# Altium PCB CNC.PcbDoc (part 1 of 3)
Units mm, origin at the board's own origin, x right, y up, seen from the top; angles counter-clockwise.
Board outline 148.41 x 98.24 mm, 4 copper layers (Top Layer, Mid-Layer 1, Ground Plane in NEGATIVE, Bottom Layer), stack 0.867 mm thick; 230 components, 218 nets, 997 pads, 307 vias.
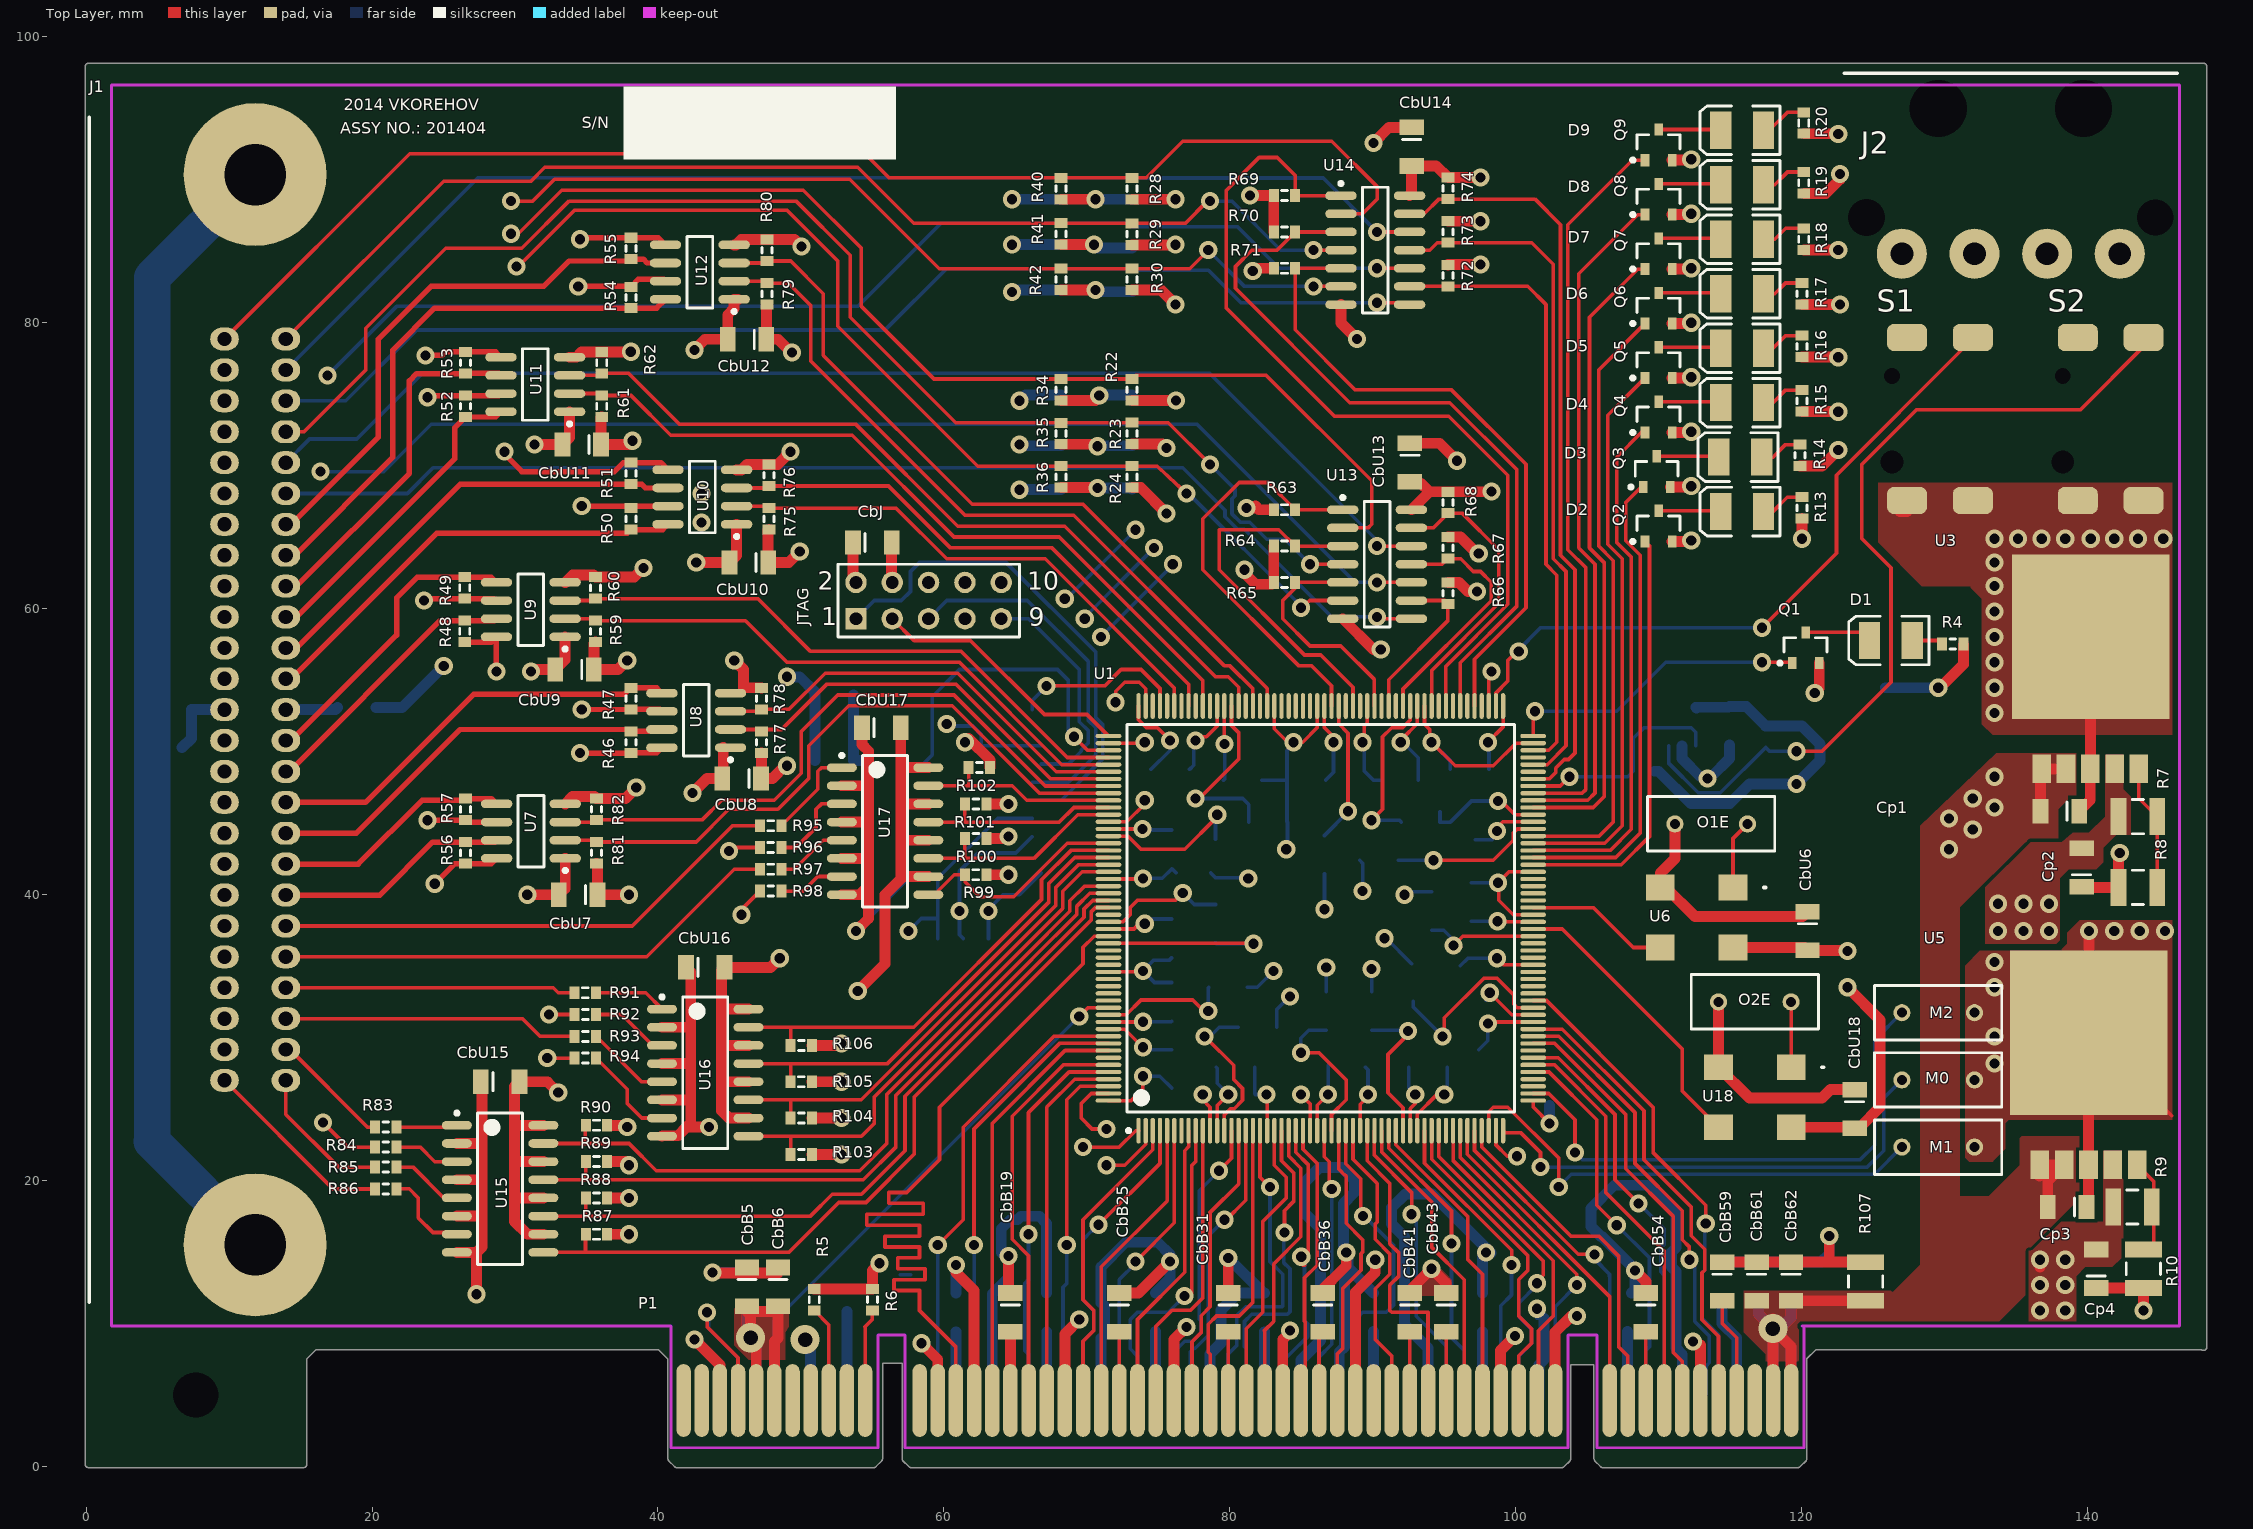
[diagram p0: Top Layer view]
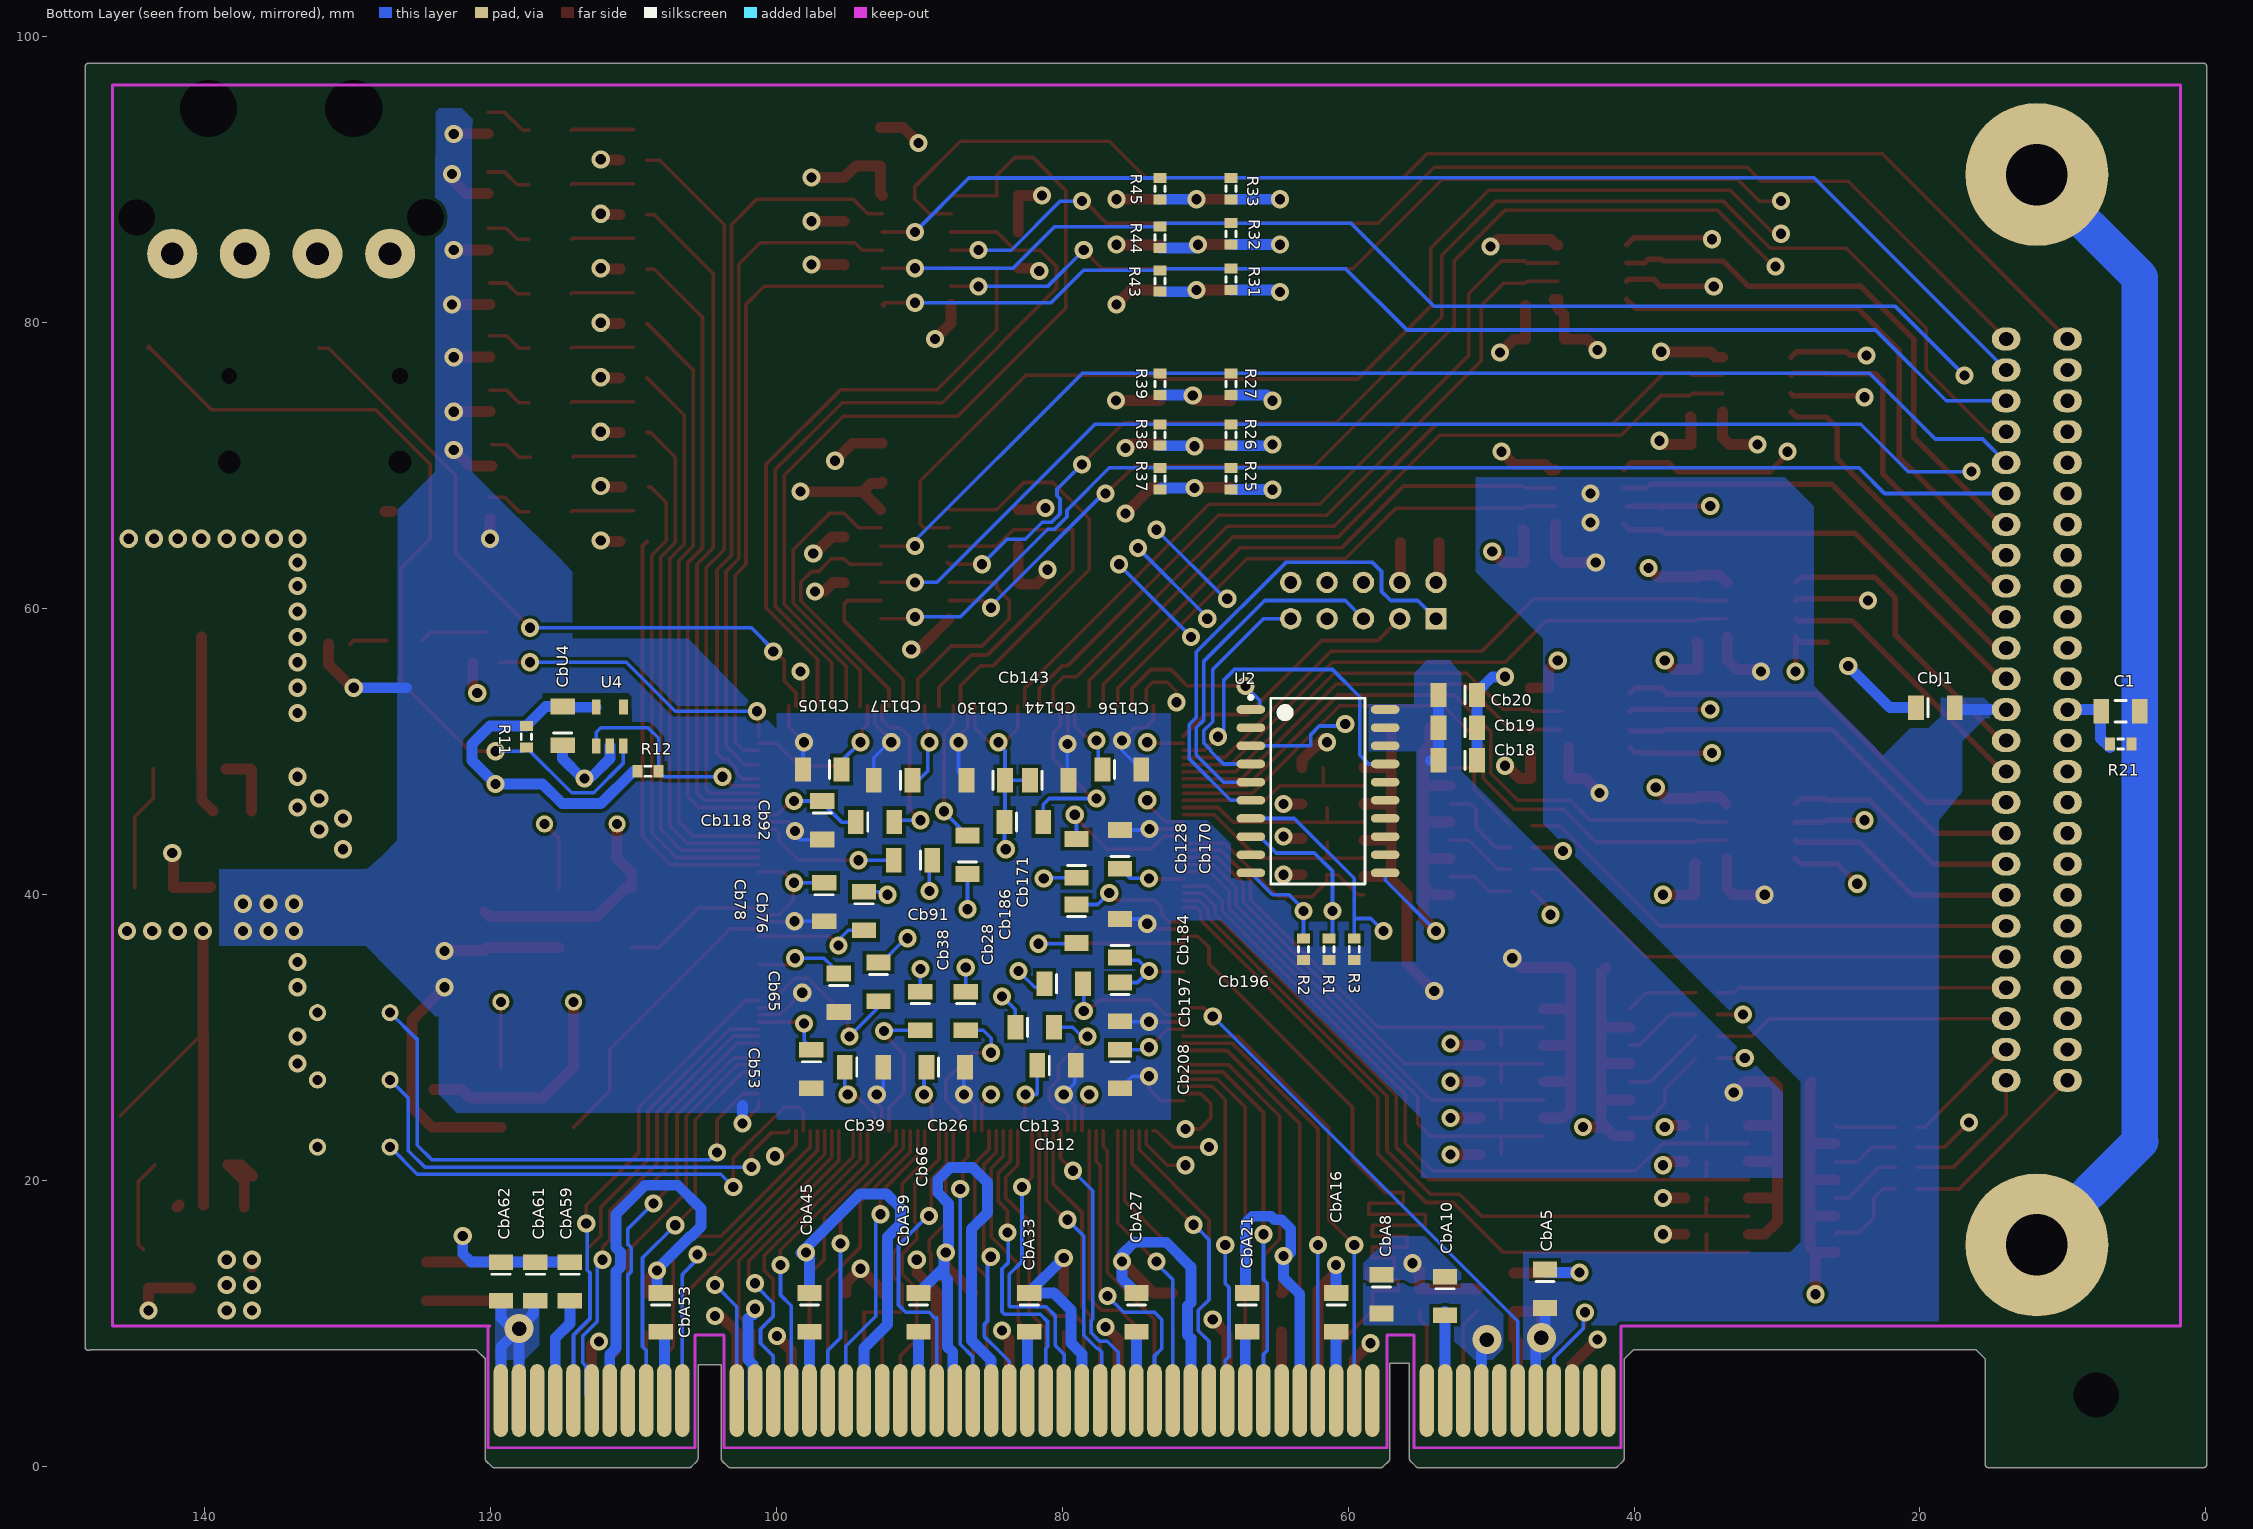
[diagram p1: Bottom Layer view, seen from below]
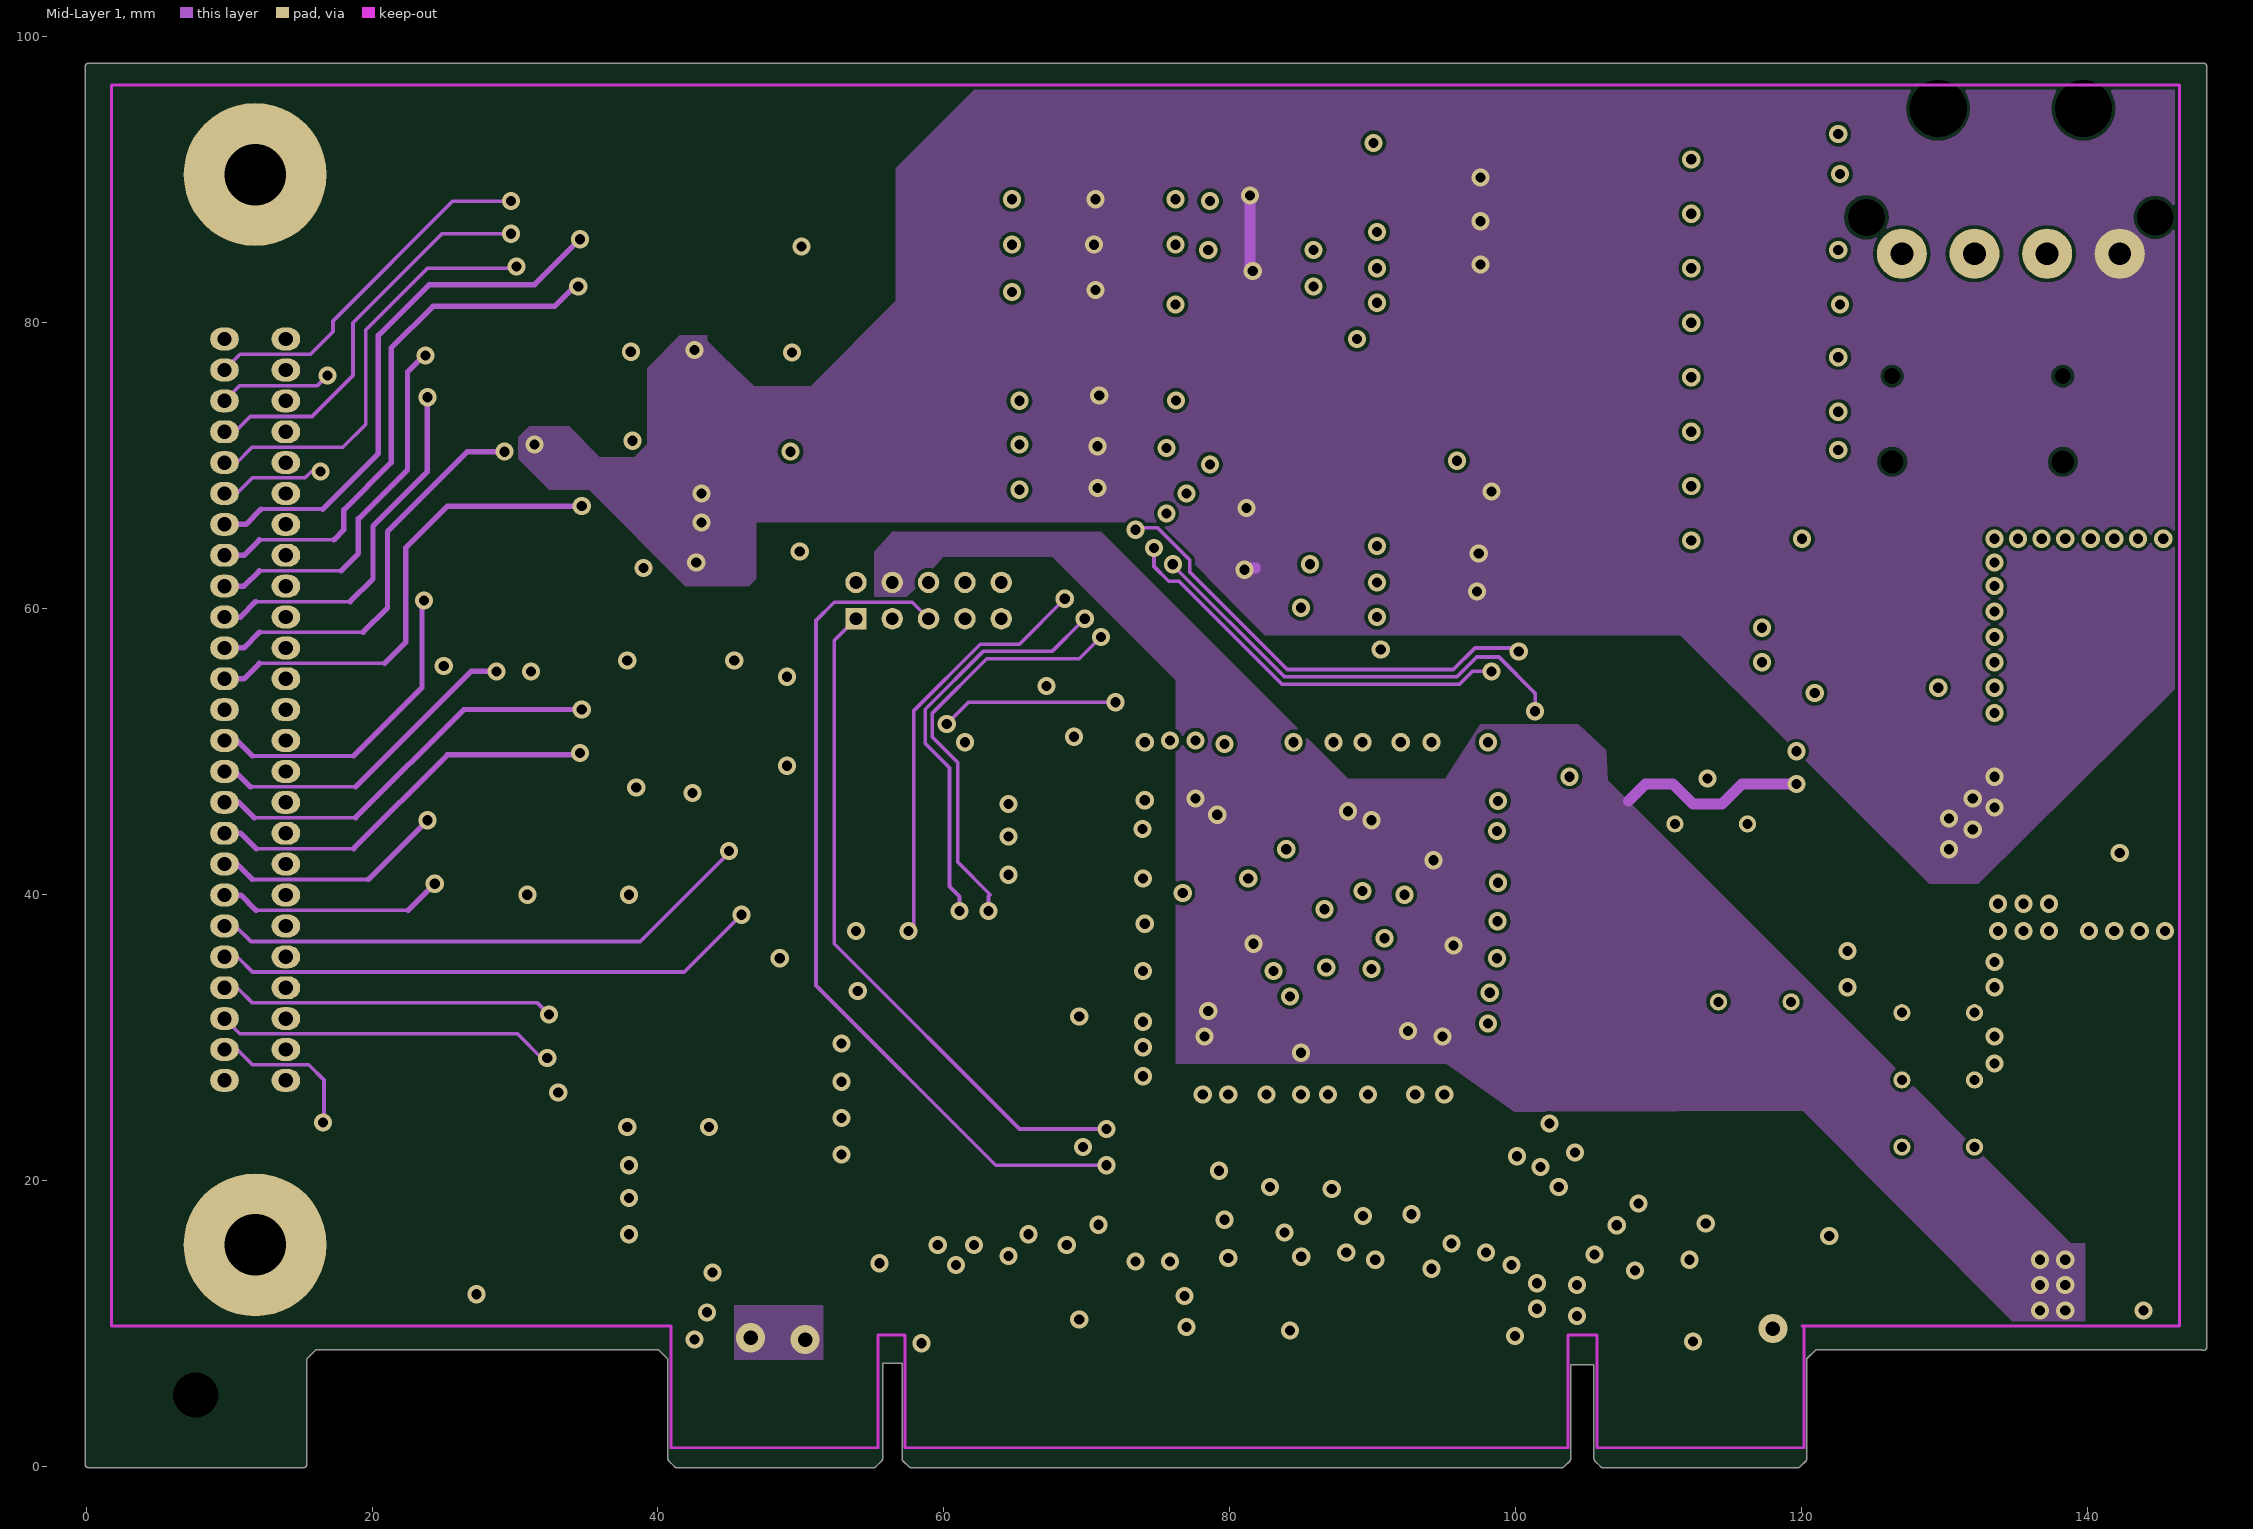
[diagram p2: Mid-Layer 1]
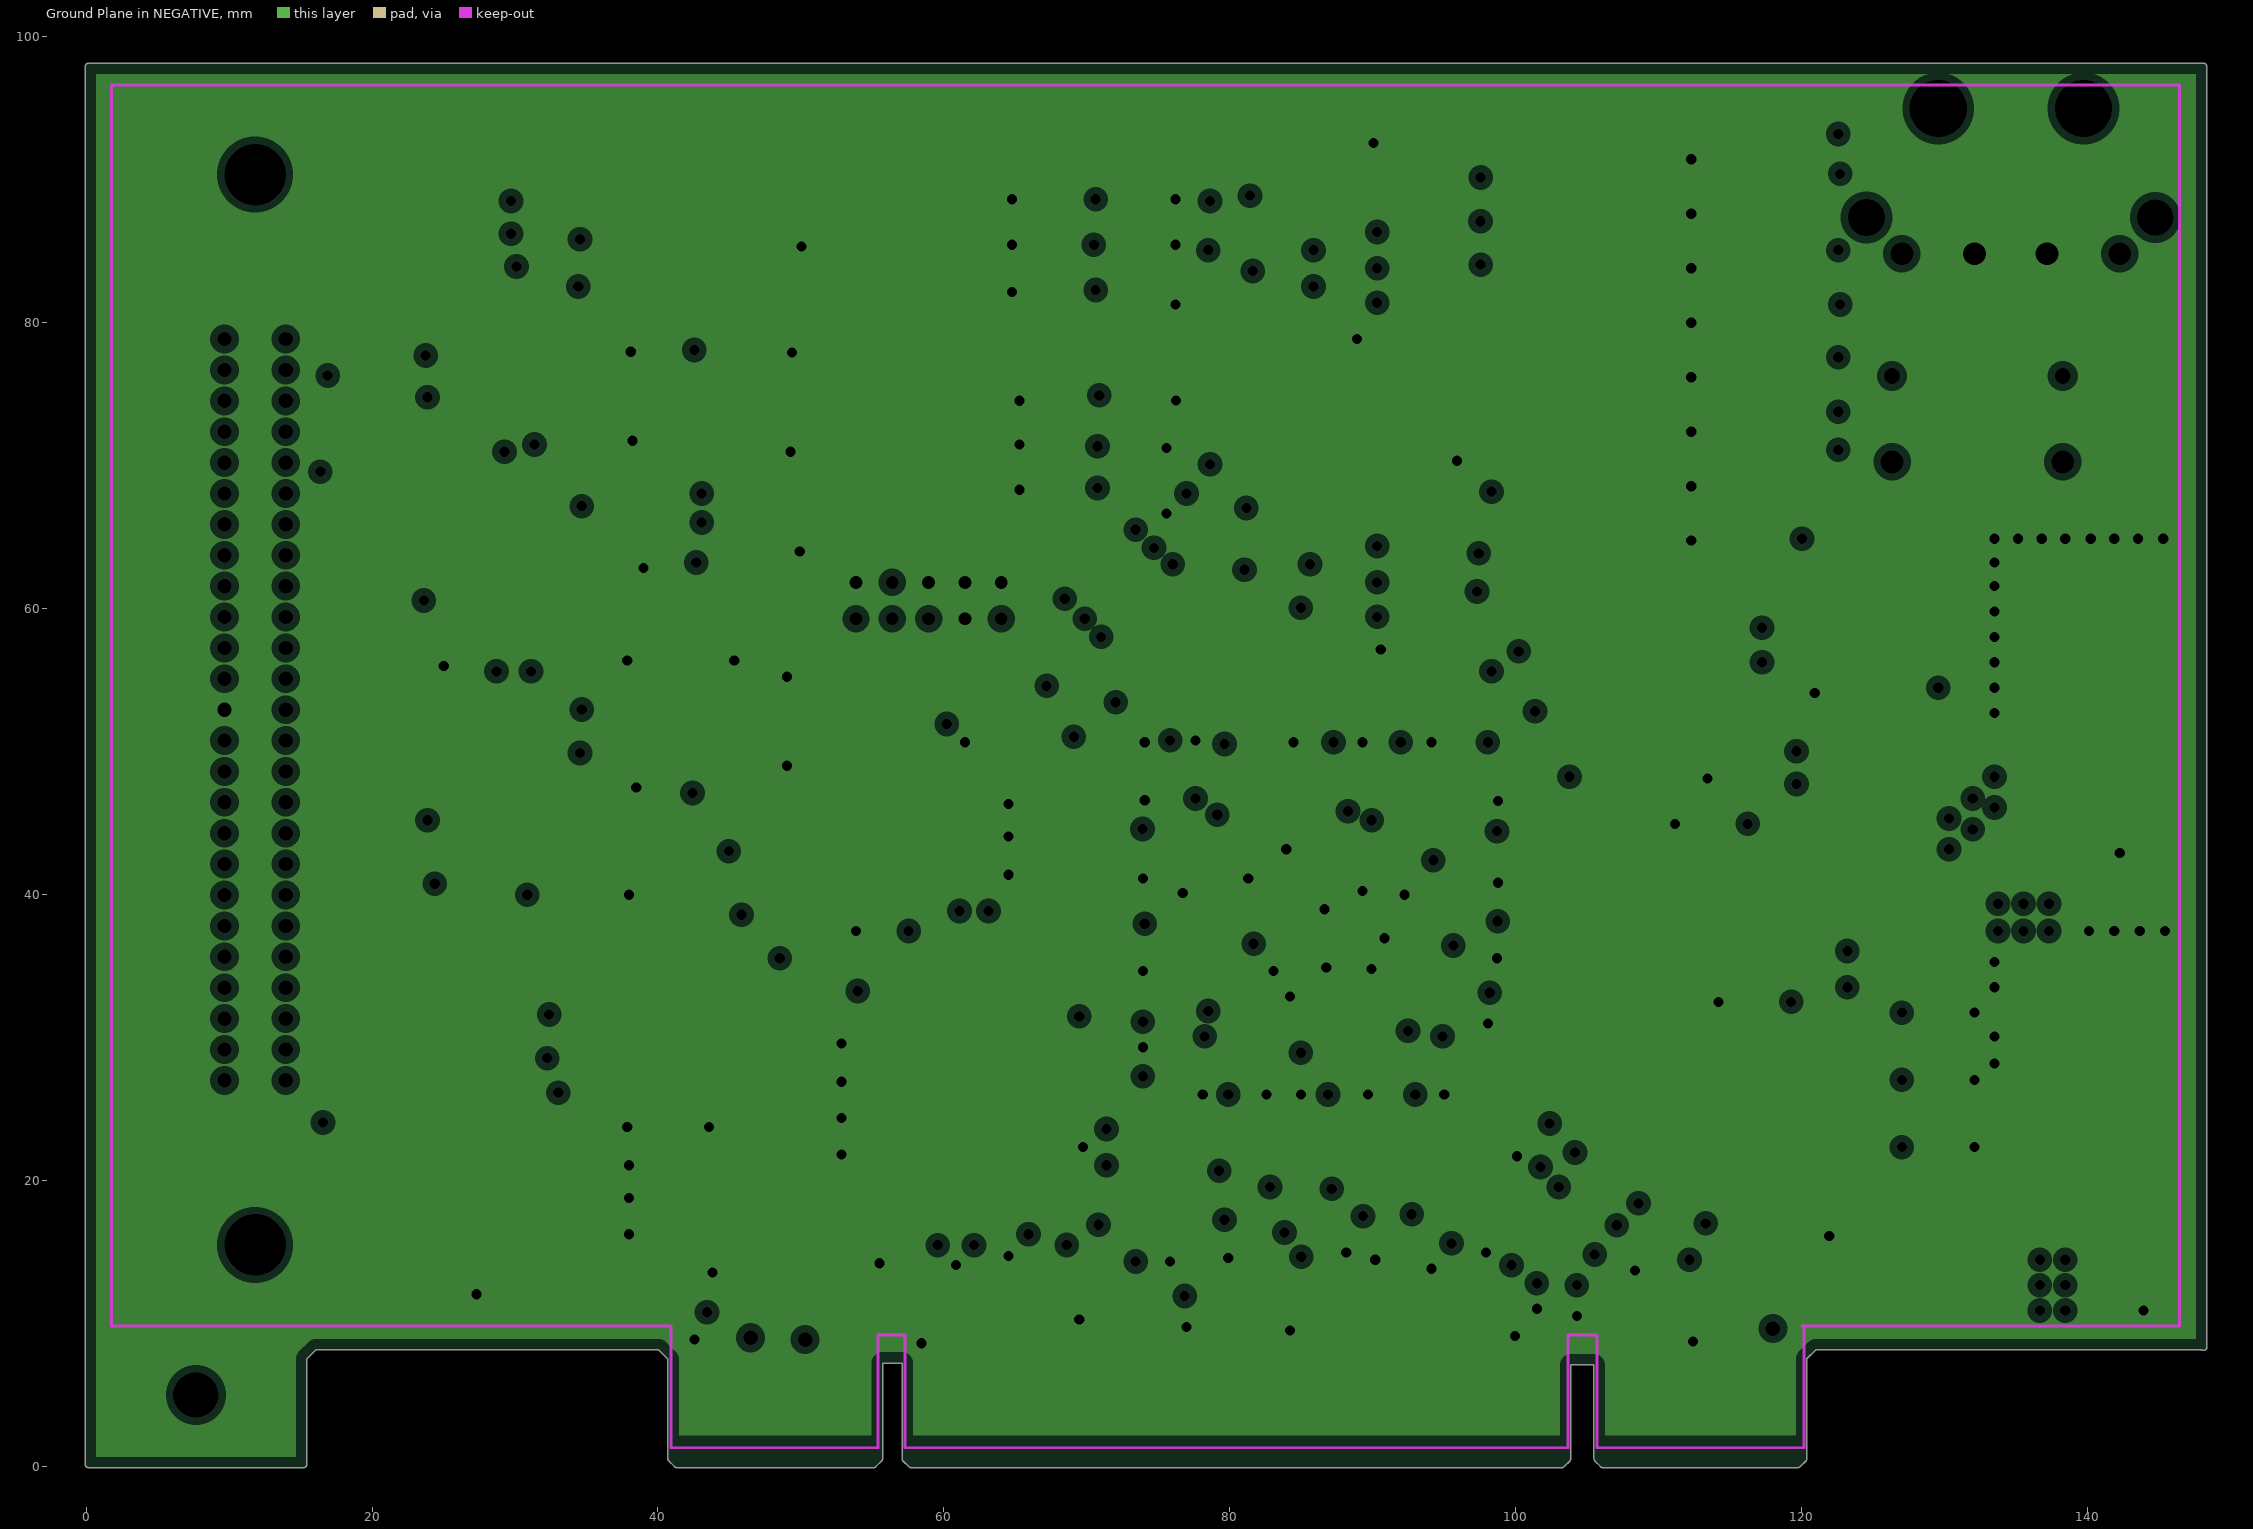
[diagram p3: Ground Plane in NEGATIVE, clearances drawn from the general rule]

## Layer stack, top to bottom
Top Solder: solder mask 0.0102, Solder Resist, Dk 3.5
Top Layer: signal copper 0.035
Dielectric1: core 0.254, FR-4, Dk 4.2
Mid-Layer 1: signal copper 0.017
Dielectric2: core 0.254, FR-4, Dk 4.2
Ground Plane in NEGATIVE: plane copper 0.0178, net GND
Dielectric3: core 0.254, Dk 4.2
Bottom Layer: signal copper 0.035
Bottom Solder: solder mask 0.0102, Solder Resist, Dk 3.5

## Board outline
-0.071,0.183 ccw(c0.183,0.183) 0.183,-0.071 15.195,-0.071 ccw(c15.195,0.183) 15.449,0.183 15.449,7.546 16.088,8.184 40.032,8.184 40.696,7.52 40.696,0.564 ccw(c40.95,0.564) 40.771,0.385 41.152,0.004 ccw(c41.331,0.183) 41.331,-0.071 55.073,-0.071 ccw(c55.073,0.183) 55.253,0.004 55.634,0.385 ccw(c55.454,0.564) 55.708,0.564 55.708,7.244 57.079,7.244 57.079,0.564 ccw(c57.333,0.564) 57.154,0.385 57.535,0.004 ccw(c57.714,0.183) 57.714,-0.071 103.206,-0.071 ccw(c103.206,0.183) 103.386,0.004 103.767,0.385 ccw(c103.587,0.564) 103.841,0.564 103.841,7.117 105.466,7.117 105.466,0.564 ccw(c105.72,0.564) 105.541,0.385 105.922,0.004 ccw(c106.101,0.183) 106.101,-0.071 119.716,-0.071 ccw(c119.716,0.183) 119.896,0.004 120.277,0.385 ccw(c120.097,0.564) 120.351,0.564 120.351,7.546 120.99,8.184 147.922,8.184 ccw(c148.082,8.382) 148.336,8.382 148.336,97.917 ccw(c148.082,97.917) 148.082,98.171 0.183,98.171 ccw(c0.183,97.917) -0.071,97.917

## Design rules (kind name [scope] priority, off if disabled: settings)
Clearance Clearance_SCSI50 [All vs HasFootprint('SCSI50')] p1: gap=0.127
Clearance Clearance_FPGA [All vs HasFootprint('PQG208_N')] p2: gap=0.191
Clearance Clearance_Default_1 [All] p3: gap=0.241
ComponentClearance [All] p1: gap=0.203 collisioncheckmode=3 verticalgap=0.254 showdistances=FALSE
DiffPairsRouting [All] p1: maxlimit=0.254 minlimit=0.254 mostfreqgap=0.254 toplayer_minwidth=0.254 toplayer_maxwidth=0.381 toplayer_prefwidth=0.381 midlayer1_minwidth=0.254 midlayer1_maxwidth=0.381 midlayer1_prefwidth=0.381 bottomlayer_minwidth=0.254 bottomlayer_maxwidth=0.381 bottomlayer_prefwidth=0.381 maxuncoupledlength=12.7
FanoutControl FanoutPQ [HasFootprint('PQG208_N')] p1: bgadir=Out bgaviamode=Centered fanoutstyle=Auto fanoutdirection=Alternating viagrid=0.025
FanoutControl Fanout_BGA [IsBGA] p2: bgadir=Out bgaviamode=Centered fanoutstyle=Auto fanoutdirection=Alternating viagrid=0.025 // Fanout_BGA (Default Rule)
FanoutControl Fanout_LCC [IsLCC] p3: bgadir=Out bgaviamode=Centered fanoutstyle=Auto fanoutdirection=Alternating viagrid=0.025 // Fanout_LCC (Default Rule)
FanoutControl Fanout_SOIC [IsSOIC] p4: bgadir=Out bgaviamode=Centered fanoutstyle=Auto fanoutdirection=Alternating viagrid=0.025 // Fanout_SOIC (Default Rule)
FanoutControl Fanout_Small [(CompPinCount < 5)] p5: bgadir=Out bgaviamode=Centered fanoutstyle=Auto fanoutdirection=OutThenIn viagrid=0.025 // Fanout_Small (Default Rule)
FanoutControl Fanout_Default [All] p6: bgadir=Out bgaviamode=Centered fanoutstyle=Auto fanoutdirection=Alternating viagrid=0.025 // Fanout_Default (Default Rule)
HoleSize [All] p1: absolutevalues=TRUE maxlimit=4.572 minlimit=0.025 maxpercent=80.000 minpercent=20.000
MinimumSolderMaskSliver MinimumSolderMaskSliver_SOT_23_5 [HasFootprint('SOT23-5') vs HasFootprint('SOT23-5')] p1: minsoldermaskwidth=0.178
MinimumSolderMaskSliver MinimumSolderMaskSliver_LT17 [HasFootprint('LT1764A') vs HasFootprint('LT1764A')] p2: minsoldermaskwidth=0.178
MinimumSolderMaskSliver [All] p3: minsoldermaskwidth=0.178
PlaneClearance [All] p1: clearance=0.508
PlaneConnect [All] p1: planeconnectstyle=Direct reliefexpansion=0.508 reliefentries=4 reliefconductorwidth=0.254 reliefairgap=0.254
PolygonConnect PolygonConnect_POWER [InNetClass('POWER')] p1: connectstyle=Direct reliefconductorwidth=0.254 reliefentries=4 polygonreliefangle="45 Angle" airgapwidth=0.254
PolygonConnect [All] p2: connectstyle=Relief reliefconductorwidth=0.254 reliefentries=4 polygonreliefangle="90 Angle" airgapwidth=0.254
RoutingTopology [All] p1: topology=Starburst
RoutingVias [All] p1: holewidth=0.5 width=0.8 viastyle="Through Hole" minholewidth=0.3 minwidth=0.6 maxholewidth=1.524 maxwidth=2.54
SMDNeckDown [All] p1: percent=400.000
SilkToSilkClearance [All] p1: silktosilkclearance=0.18
SilkToSolderMaskClearance SilkToSolderMaskClearance_1 [IsPad vs HasFootprint('J1-0603')] p1: minsilkscreentomaskgap=0.076 clearancetoexposedcopper=TRUE
SilkToSolderMaskClearance [IsPad] p2: minsilkscreentomaskgap=0.18 clearancetoexposedcopper=TRUE
SolderMaskExpansion [All] p1: expansion=0.102
Width Width_power [InNetClass('POWER')] p1: maxlimit=4.572 minlimit=0.178 preferedwidth=0.254
Width Width_1 [All] p2: maxlimit=0.762 minlimit=0.178 preferedwidth=0.254
15 further rules are at their usual default settings.

## Classes and differential pairs
net class POWER: 2V5 3V3 5V GND NetC1_2
differential pair ZP: +ZP_P -ZP_N
differential pair ZD: +ZD_P -ZD_N
differential pair YP: +YP_P -YP_N
differential pair YD: +YD_P -YD_N
differential pair XP: +XP_P -XP_N
differential pair XD: +XD_P -XD_N
differential pair CP: +CP_P -CP_N
differential pair CD: +CD_P -CD_N
differential pair BP: +BP_P -BP_N
differential pair BD: +BD_P -BD_N
differential pair AP: +AP_P -AP_N
differential pair AD: +AD_P -AD_N

## Components (designator, comment, footprint, x,y, rotation, side; value= is the part's Value field where it differs from the comment)
C1 "4.7nF" C1206 5.969,52.832 r180 bottom
Cb12 "100nF" C1206_POL 80.391,28.067 r180 bottom
Cb13 "100nF" C1206_POL 81.915,30.734 r180 bottom
Cb18 "100nF" C1206_POL 52.324,49.403 r0 bottom
Cb19 "100nF" C1206_POL 52.324,51.689 r0 bottom
Cb20 "100nF" C1206_POL 52.324,53.975 r0 bottom
Cb26 "100nF" C1206_POL 88.138,27.94 r180 bottom
Cb28 "100nF" C1206_POL 86.741,31.877 r270 bottom
Cb38 "100nF" C1206_POL 89.916,31.877 r270 bottom
Cb39 "100nF" C1206_POL 93.853,27.94 r180 bottom
Cb53 "100nF" C1206_POL 97.536,27.813 r270 bottom
Cb65 "100nF" C1206_POL 95.631,33.147 r270 bottom
Cb66 "100nF" C1206_POL 92.837,33.909 r270 bottom
Cb76 "100nF" C1206_POL 93.853,38.862 r270 bottom
Cb78 "100nF" C1206_POL 96.647,39.497 r270 bottom
Cb91 "100nF" C1206_POL 90.424,42.418 r0 bottom
Cb92 "100nF" C1206_POL 96.774,45.212 r270 bottom
Cb105 "100nF" C1206_POL 96.774,48.768 r0 bottom
Cb117 "100nF" C1206_POL 91.821,48.006 r0 bottom
Cb118 "100nF" C1206_POL 93.091,45.085 r180 bottom
Cb128 "100nF" C1206_POL 86.614,42.799 r90 bottom
Cb130 "100nF" C1206_POL 85.344,48.006 r0 bottom
Cb143 "100nF" C1206_POL 82.677,45.085 r180 bottom
Cb144 "100nF" C1206_POL 80.899,48.006 r180 bottom
Cb156 "100nF" C1206_POL 75.819,48.768 r180 bottom
Cb170 "100nF" C1206_POL 75.946,43.18 r90 bottom
Cb171 "100nF" C1206_POL 78.994,42.545 r90 bottom
Cb184 "100nF" C1206_POL 75.946,36.957 r90 bottom
Cb186 "100nF" C1206_POL 78.994,37.973 r270 bottom
Cb196 "100nF" C1206_POL 79.883,33.782 r180 bottom
Cb197 "100nF" C1206_POL 75.946,32.512 r270 bottom
Cb208 "100nF" C1206_POL 75.946,27.813 r270 bottom
CbA5 "1uF" C1206_POL 46.228,12.446 r270 bottom
CbA8 "1uF" C1206_POL 57.658,12.065 r270 bottom
CbA10 "100nF" C1206_POL 53.213,11.938 r270 bottom
CbA16 "100nF" C1206_POL 60.833,10.795 r270 bottom
CbA21 "100nF" C1206_POL 67.056,10.795 r270 bottom
CbA27 "100nF" C1206_POL 74.803,10.795 r270 bottom
CbA33 "100nF" C1206_POL 82.296,10.795 r270 bottom
CbA39 "100nF" C1206_POL 90.043,10.795 r270 bottom
CbA45 "100nF" C1206_POL 97.663,10.795 r270 bottom
CbA53 "100nF" C1206_POL 108.077,10.795 r270 bottom
CbA59 "100nF" C1206_POL 114.427,12.954 r270 bottom
CbA61 "1uF" C1206_POL 116.84,12.954 r270 bottom
CbA62 "1uF" C1206_POL 119.253,12.954 r270 bottom
CbB5 "1uF" C1206_POL 46.228,12.573 r270 top
CbB6 "1uF" C1206_POL 48.387,12.573 r270 top
CbB19 "100nF" C1206_POL 64.643,10.795 r270 top
CbB25 "100nF" C1206_POL 72.269,10.795 r270 top
CbB31 "100nF" C1206_POL 79.883,10.795 r270 top
CbB36 "100nF" C1206_POL 86.487,10.795 r270 top
CbB41 "100nF" C1206_POL 92.583,10.795 r270 top
CbB43 "100nF" C1206_POL 95.123,10.795 r270 top
CbB54 "100nF" C1206_POL 109.093,10.795 r270 top
CbB59 "100nF" C1206_POL 114.427,12.954 r270 top
CbB61 "1uF" C1206_POL 116.84,12.954 r270 top
CbB62 "1uF" C1206_POL 119.253,12.954 r270 top
CbJ "1uF" C1206_POL 54.991,64.643 r0 top
CbJ1 "10uF" C1206_POL 18.923,53.086 r180 bottom
CbU4 "1uF" C1206_POL 114.935,51.816 r90 bottom
CbU6 "100nF" C1206_POL 120.396,37.465 r270 top
CbU7 "1uF" C1206_POL 34.417,40.005 r180 top
CbU8 "1uF" C1206_POL 45.847,48.133 r180 top
CbU9 "1uF" C1206_POL 34.163,55.753 r180 top
CbU10 "1uF" C1206_POL 46.355,63.246 r180 top
CbU11 "1uF" C1206_POL 34.671,71.501 r180 top
CbU12 "1uF" C1206_POL 46.228,78.855 r180 top
CbU13 "1uF" C1206_POL 92.583,70.231 r270 top
CbU14 "1uF" C1206_POL 92.71,92.329 r270 top
CbU15 "1uF" C1206_POL 28.956,26.924 r0 top
CbU16 "1uF" C1206_POL 43.307,34.925 r0 top
CbU17 "1uF" C1206_POL 55.626,51.689 r0 top
CbU18 "100nF" C1206_POL 123.698,25.019 r270 top
Cp1 "10uF" C1206_POL 138.049,45.847 r180 top
Cp2 "10uF" C1206_POL 139.573,41.91 r90 top
Cp3 "10uF" C1206_POL 138.557,18.161 r180 top
Cp4 "10uF" C1206_POL 140.589,13.843 r90 top
D1 "LED3" 3.5X2.8X1.9 126.238,57.785 r180 top
D2 "LED3" 3.5X2.8X1.9 115.824,66.802 r180 top
D3 "LED3" 3.5X2.8X1.9 115.697,70.612 r180 top
D4 "LED3" 3.5X2.8X1.9 115.824,74.422 r180 top
D5 "LED3" 3.5X2.8X1.9 115.824,78.232 r180 top
D6 "LED3" 3.5X2.8X1.9 115.824,82.042 r180 top
D7 "LED3" 3.5X2.8X1.9 115.824,85.852 r180 top
D8 "LED3" 3.5X2.8X1.9 115.824,89.662 r180 top
D9 "LED3" 3.5X2.8X1.9 115.824,93.472 r180 top
J1 "Connector 50" SCSI50 13.97,78.867 r270 top
J2 "Molex8981" molex8981 134.62,84.836 r0 top
JTAG "JTAG" HDR2X5 53.848,59.309 r0 top
M0 "M0" RAD-0.2 129.54,27.051 r180 top
M1 "M0" RAD-0.2 129.54,22.352 r180 top
M2 "M0" RAD-0.2 129.54,31.75 r180 top
O1E "M0" RAD-0.2 113.665,44.958 r0 top
O2E "M0" RAD-0.2 116.713,32.512 r0 top
P1 "PCIUV32BIT_LABELED" PCIUV32BIT 41.789,4.628 r0 top locked (schematic designator PCIUV32BIT_LABELED)
Q1 "BCR133" SOT-23B_L 120.269,57.277 r90 top
Q2 "BCR133" SOT-23B_L 109.982,65.786 r90 top
Q3 "BCR133" SOT-23B_L 109.855,69.596 r90 top
Q4 "BCR133" SOT-23B_L 109.982,73.406 r90 top
Q5 "BCR133" SOT-23B_L 109.982,77.216 r90 top
Q6 "BCR133" SOT-23B_L 109.982,81.026 r90 top
Q7 "BCR133" SOT-23B_L 109.982,84.836 r90 top
Q8 "BCR133" SOT-23B_L 109.982,88.646 r90 top
Q9 "BCR133" SOT-23B_L 109.982,92.456 r90 top
R1 "3.3k" J1-0603 61.341,36.195 r270 bottom
R2 "3.3k" J1-0603 63.119,36.195 r270 bottom
R3 "3.3k" J1-0603 59.563,36.195 r270 bottom
R4 "330R" J1-0603 130.556,57.531 r0 top
R5 "0R" J1-0603 50.927,11.684 r270 top
R6 "0R" J1-0603 54.991,11.684 r270 top
R7 "76.8R1%" 14-1210 143.51,45.466 r0 top
R8 "44.2R1%" 14-1210 143.51,40.513 r180 top
R9 "64.9R1%" 14-1210 143.129,18.161 r0 top
R10 "60.4R1%" 14-1210 143.891,13.843 r270 top
R11 "3.3k" J1-0603 117.475,51.054 r90 bottom
R12 "3.3k" J1-0603 108.966,48.641 r0 bottom
R13 "330R" J1-0603 120.015,67.056 r270 top
R14 "330R" J1-0603 119.888,70.739 r270 top
R15 "330R" J1-0603 120.015,74.549 r270 top
R16 "330R" J1-0603 120.015,78.359 r270 top
R17 "330R" J1-0603 120.015,82.042 r270 top
R18 "330R" J1-0603 120.142,85.852 r270 top
R19 "330R" J1-0603 120.142,89.789 r270 top
R20 "330R" J1-0603 120.142,93.98 r270 top
R21 "1M" J1-0603 5.969,50.546 r180 bottom
R22 "3.3k" J1-0603 73.152,75.323 r270 top
R23 "3.3k" J1-0603 73.152,72.275 r270 top
R24 "3.3k" J1-0603 73.152,69.227 r270 top
R25 "3.3k" J1-0603 68.199,69.1 r270 bottom
R26 "3.3k" J1-0603 68.199,72.16 r270 bottom
R27 "3.3k" J1-0603 68.199,75.716 r270 bottom
R28 "3.3k" J1-0603 73.152,89.396 r270 top
R29 "3.3k" J1-0603 73.152,86.209 r270 top
R30 "3.3k" J1-0603 73.152,83.046 r270 top
R31 "3.3k" J1-0603 68.199,83.046 r270 bottom
R32 "3.3k" J1-0603 68.199,86.221 r270 bottom
R33 "3.3k" J1-0603 68.199,89.396 r270 bottom
R34 "3.3k" J1-0603 68.199,75.323 r90 top
R35 "3.3k" J1-0603 68.199,72.263 r90 top
R36 "3.3k" J1-0603 68.199,69.227 r90 top
R37 "3.3k" J1-0603 73.152,69.112 r90 bottom
R38 "3.3k" J1-0603 73.152,72.16 r90 bottom
R39 "3.3k" J1-0603 73.152,75.716 r90 bottom
R40 "3.3k" J1-0603 68.199,89.396 r90 top
R41 "3.3k" J1-0603 68.199,86.221 r90 top
R42 "3.3k" J1-0603 68.199,83.046 r90 top
R43 "3.3k" J1-0603 73.152,82.931 r90 bottom
R44 "3.3k" J1-0603 73.152,85.979 r90 bottom
R45 "3.3k" J1-0603 73.152,89.384 r90 bottom
R46 "330R" J1-0603 38.1,50.673 r90 top
R47 "330R" J1-0603 38.1,53.721 r90 top
R48 "330R" J1-0603 26.483,58.42 r90 top
R49 "330R" J1-0603 26.483,61.468 r90 top
R50 "330R" J1-0603 38.1,66.294 r90 top
R51 "330R" J1-0603 38.1,69.469 r90 top
R52 "330R" J1-0603 26.543,74.168 r90 top
R53 "330R" J1-0603 26.543,77.216 r90 top
R54 "330R" J1-0603 38.1,81.776 r90 top
R55 "330R" J1-0603 38.1,85.205 r90 top
R56 "330R" J1-0603 26.543,42.926 r90 top
R57 "330R" J1-0603 26.543,45.974 r90 top
R59 "3.3k" J1-0603 35.627,58.42 r270 top
R60 "3.3k" J1-0603 35.627,61.468 r270 top
R61 "3.3k" J1-0603 36.068,74.168 r270 top
R62 "3.3k" J1-0603 36.068,77.216 r270 top
R63 "3.3k" J1-0603 83.82,66.929 r180 top
R64 "3.3k" J1-0603 83.82,64.389 r180 top
R65 "3.3k" J1-0603 83.82,61.849 r180 top
R66 "3.3k" J1-0603 95.25,61.087 r90 top
R67 "3.3k" J1-0603 95.25,64.262 r90 top
R68 "3.3k" J1-0603 95.25,67.437 r90 top
R69 "3.3k" J1-0603 83.82,88.9 r180 top
R70 "3.3k" J1-0603 83.82,86.36 r180 top
R71 "3.3k" J1-0603 83.82,83.82 r180 top
R72 "3.3k" J1-0603 95.25,83.312 r90 top
R73 "3.3k" J1-0603 95.25,86.36 r90 top
R74 "3.3k" J1-0603 95.25,89.408 r90 top
R75 "3.3k" J1-0603 47.752,66.294 r90 top
R76 "3.3k" J1-0603 47.752,69.342 r90 top
R77 "3.3k" J1-0603 47.244,50.673 r90 top
R78 "3.3k" J1-0603 47.244,53.721 r90 top
R79 "3.3k" J1-0603 47.625,82.03 r90 top
R80 "3.3k" J1-0603 47.625,85.078 r90 top
R81 "3.3k" J1-0603 35.687,42.938 r270 top
R82 "3.3k" J1-0603 35.687,45.986 r270 top
R83 "330R" J1-0603 20.955,23.749 r180 top
R84 "330R" J1-0603 20.955,22.352 r180 top
R85 "330R" J1-0603 20.955,20.955 r180 top
R86 "330R" J1-0603 20.955,19.431 r180 top
R87 "1k" J1-0603 35.699,16.256 r180 top
R88 "1k" J1-0603 35.699,18.796 r180 top
R89 "1k" J1-0603 35.699,21.336 r180 top
R90 "1k" J1-0603 35.699,23.876 r180 top
R91 "330R" J1-0603 34.925,33.147 r180 top
R92 "330R" J1-0603 34.925,31.623 r180 top
R93 "330R" J1-0603 34.925,30.099 r180 top
R94 "330R" J1-0603 34.925,28.575 r180 top
R95 "330R" J1-0603 47.879,44.831 r180 top
R96 "330R" J1-0603 47.879,43.307 r180 top
R97 "330R" J1-0603 47.879,41.783 r180 top
R98 "330R" J1-0603 47.891,40.259 r180 top
R99 "1k" J1-0603 62.23,41.402 r180 top
R100 "1k" J1-0603 62.23,43.942 r180 top
R101 "1k" J1-0603 62.23,46.355 r180 top
R102 "1k" J1-0603 62.484,48.895 r180 top
R103 "1k" J1-0603 50.026,21.844 r180 top
R104 "1k" J1-0603 50.026,24.384 r180 top
R105 "1k" J1-0603 50.026,26.924 r180 top
R106 "1k" J1-0603 50.026,29.464 r180 top
R107 "180R" 14-1210 124.46,12.954 r90 top
S1 "PVB4OA" PVB4 129.667,73.279 r90 top
S2 "PVB4OA" PVB4 141.605,73.279 r90 top
U1 "XC2S50-5PQG208C" PQG208_N 86.36,38.354 r90 top
U2 "XC18V01SOG20C" SOG20_N 62.103,47.244 r180 bottom
U3 "LT1764A" LT1764A 136.779,58.801 r0 top
U4 "TPS3823" SOT23-5 111.633,50.419 r180 bottom
U5 "LT1764A" LT1764A 136.652,31.115 r0 top
U6 "CB3" CB3 115.189,40.513 r180 top
U7 "uA9638C" SO8_N 31.115,44.45 r180 top
U8 "uA9638C" SO8_N 42.672,52.197 r180 top
U9 "uA9638C" SO8_N 31.102,59.944 r180 top
U10 "uA9638C" SO8_N 43.1,67.818 r180 top
U11 "uA9638C" SO8_N 31.416,75.692 r180 top
U12 "uA9638C" SO8_N 42.926,83.554 r180 top
U13 "SN7407DR" SO14 90.297,63.119 r0 top
U14 "SN7407DR" SO14 90.17,85.09 r0 top
U15 "TLP291-4" TOSHIBA_11_11F1 28.956,19.431 r0 top
U16 "TLP291-4" TOSHIBA_11_11F1 43.307,27.559 r0 top
U17 "TLP291-4" TOSHIBA_11_11F1 55.88,44.45 r0 top
U18 "CB3" CB3 119.253,27.94 r180 top

## Footprints (in the part's own frame and the unit in brackets; to place one, negate y for a bottom-side part, rotate by r counter-clockwise, add the part's x,y. Pads: shape width x height; smd on the part's side, far side on the other; paste and mask are expansions set on the pad)
3.5X2.8X1.9 [mm] "SM LED; 2 C-Bend Leads; Body 3.5 x 2.8 x 1.9 mm, inc leads (LxWxH typ)"
  rect 1.5x2.6 smd: 1(-1.5,0) 2(1.5,0)
  silkscreen extent -2.65,-1.7 2.95,1.7
14-1210 [mm] "Chip Resistor, Body 3.2x2.5mm, IPC High Density"
  rect 1.1x2.6 smd: 1(-1.35,0) 2(1.35,0)
  silkscreen extent -0.4,-1.2 0.4,1.2, body extent -1.68,-1.32 1.68,1.32, height 0.9
C1206 [mm] "Chip Capacitor, Body 3.2x1.6mm, IPC High Density"
  rect 1.1x1.7 smd: 1(-1.35,0) 2(1.35,0)
  silkscreen extent -0.4,-0.75 0.4,0.75, body extent -1.7,-0.9 1.7,0.9, height 1.3
C1206_POL [mm] "Chip Capacitor, Body 3.2x1.6mm, IPC High Density"
  rect 1.1x1.7 smd: +(-1.35,0) -(1.35,0)
  silkscreen extent -0.51,-0.63 -0.51,0.64, body extent -1.7,-0.9 1.7,0.9, height 1.3
CB3 [mm]
  rect 2x1.8 smd: 1(0,0) 2(5.08,0) 3(5.08,4.2) 4(0,4.2)
  silkscreen extent -2.29,0 -2.16,0
HDR2X5 [mm] "Connector; Header; 5x2 Position"
  rect 1.5x1.5 hole 0.9: 1(0,0)
  round 1.5 hole 0.9: 2(0,2.54) 3(2.54,0) 4(2.54,2.54) 5(5.08,0) 6(5.08,2.54) 7(7.62,0) 8(7.62,2.54) 9(10.16,0) 10(10.16,2.54)
  silkscreen extent -1.27,-1.27 11.43,3.81
J1-0603 [mm] "Chip Resistor, Body 1.6x0.8mm, IPC High Density"
  rect 0.7x0.9 smd: 1(-0.75,0) 2(0.75,0)
  silkscreen extent -0.2,-0.35 0.2,0.35, body extent -0.85,-0.48 0.85,0.48, height 0.9
LT1764A [mm]
  rect 1.3x2 smd: G(3.4,-10) IN(1.7,-10) OUT(5.1,-10) SENSE(6.8,-10) SHDN(0,-10)
  rect 11x11.5 smd: G(3.429,-0.762)
molex8981 [mm]
  round 0 hole 2.6: 0(-10.1,2.54)
  round 0 hole 4: 0(-5.08,10.16) 0(5.08,10.16)
  round 0 hole 2.54: 0(10.1,2.54)
  round 3.5 hole 1.6: 1(-7.62,0) 2(-2.54,0) 3(2.54,0) 4(7.62,0)
  silkscreen extent -11.63,12.63 11.63,12.63
PCIUV32BIT [mil]
  oval 40x200 smd far side: A1(0,0) A2(50,0) A3(100,0) A4(150,0) A5(200,0) A6(250,0) A7(300,0) A8(350,0) A9(400,0) A10(450,0) A11(500,0) A14(650,0) A15(700,0) A16(750,0) A17(800,0) A18(850,0) A19(900,0) A20(950,0) A21(1000,0) A22(1050,0) A23(1100,0) A24(1150,0) A25(1200,0) A26(1250,0) A27(1300,0) A28(1350,0) A29(1400,0) A30(1450,0) A31(1500,0) A32(1550,0) A33(1600,0) A34(1650,0) A35(1700,0) A36(1750,0) A37(1800,0) A38(1850,0) A39(1900,0) A40(1950,0) A41(2000,0) A42(2050,0) A43(2100,0) A44(2150,0) A45(2200,0) A46(2250,0) A47(2300,0) A48(2350,0) A49(2400,0) A52(2550,0) A53(2600,0) A54(2650,0) A55(2700,0) A56(2750,0) A57(2800,0) A58(2850,0) A59(2900,0) A60(2950,0) A61(3000,0) A62(3050,0)
  oval 40x200 smd: B1(0,0) B2(50,0) B3(100,0) B4(150,0) B5(200,0) B6(250,0) B7(300,0) B8(350,0) B9(400,0) B10(450,0) B11(500,0) B14(650,0) B15(700,0) B16(750,0) B17(800,0) B18(850,0) B19(900,0) B20(950,0) B21(1000,0) B22(1050,0) B23(1100,0) B24(1150,0) B25(1200,0) B26(1250,0) B27(1300,0) B28(1350,0) B29(1400,0) B30(1450,0) B31(1500,0) B32(1550,0) B33(1600,0) B34(1650,0) B35(1700,0) B36(1750,0) B37(1800,0) B38(1850,0) B39(1900,0) B40(1950,0) B41(2000,0) B42(2050,0) B43(2100,0) B44(2150,0) B45(2200,0) B46(2250,0) B47(2300,0) B48(2350,0) B49(2400,0) B52(2550,0) B53(2600,0) B54(2650,0) B55(2700,0) B56(2750,0) B57(2800,0) B58(2850,0) B59(2900,0) B60(2950,0) B61(3000,0) B62(3050,0)
PQG208_N [mm] "Shrink QFP, 208-Leads, Body 28x28mm, Pitch 0.5mm, IPC Medium Density"
  oval 1.8x0.3 smd: 1(-14.85,12.75) 2(-14.85,12.25) 3(-14.85,11.75) 4(-14.85,11.25) 5(-14.85,10.75) 6(-14.85,10.25) 7(-14.85,9.75) 8(-14.85,9.25) 9(-14.85,8.75) 10(-14.85,8.25) 11(-14.85,7.75) 12(-14.85,7.25) 13(-14.85,6.75) 14(-14.85,6.25) 15(-14.85,5.75) 16(-14.85,5.25) 17(-14.85,4.75) 18(-14.85,4.25) 19(-14.85,3.75) 20(-14.85,3.25) 21(-14.85,2.75) 22(-14.85,2.25) 23(-14.85,1.75) 24(-14.85,1.25) 25(-14.85,0.75) 26(-14.85,0.25) 27(-14.85,-0.25) 28(-14.85,-0.75) 29(-14.85,-1.25) 30(-14.85,-1.75) 31(-14.85,-2.25) 32(-14.85,-2.75) 33(-14.85,-3.25) 34(-14.85,-3.75) 35(-14.85,-4.25) 36(-14.85,-4.75) 37(-14.85,-5.25) 38(-14.85,-5.75) 39(-14.85,-6.25) 40(-14.85,-6.75) 41(-14.85,-7.25) 42(-14.85,-7.75) 43(-14.85,-8.25) 44(-14.85,-8.75) 45(-14.85,-9.25) 46(-14.85,-9.75) 47(-14.85,-10.25) 48(-14.85,-10.75) 49(-14.85,-11.25) 50(-14.85,-11.75) 51(-14.85,-12.25) 52(-14.85,-12.75) 105(14.85,-12.75) 106(14.85,-12.25) 107(14.85,-11.75) 108(14.85,-11.25) 109(14.85,-10.75) 110(14.85,-10.25) 111(14.85,-9.75) 112(14.85,-9.25) 113(14.85,-8.75) 114(14.85,-8.25) 115(14.85,-7.75) 116(14.85,-7.25) 117(14.85,-6.75) 118(14.85,-6.25) 119(14.85,-5.75) 120(14.85,-5.25) 121(14.85,-4.75) 122(14.85,-4.25) 123(14.85,-3.75) 124(14.85,-3.25) 125(14.85,-2.75) 126(14.85,-2.25) 127(14.85,-1.75) 128(14.85,-1.25) 129(14.85,-0.75) 130(14.85,-0.25) 131(14.85,0.25) 132(14.85,0.75) 133(14.85,1.25) 134(14.85,1.75) 135(14.85,2.25) 136(14.85,2.75) 137(14.85,3.25) 138(14.85,3.75) 139(14.85,4.25) 140(14.85,4.75) 141(14.85,5.25) 142(14.85,5.75) 143(14.85,6.25) 144(14.85,6.75) 145(14.85,7.25) 146(14.85,7.75) 147(14.85,8.25) 148(14.85,8.75) 149(14.85,9.25) 150(14.85,9.75) 151(14.85,10.25) 152(14.85,10.75) 153(14.85,11.25) 154(14.85,11.75) 155(14.85,12.25) 156(14.85,12.75)
  oval 0.3x1.8 smd: 53(-12.75,-14.85) 54(-12.25,-14.85) 55(-11.75,-14.85) 56(-11.25,-14.85) 57(-10.75,-14.85) 58(-10.25,-14.85) 59(-9.75,-14.85) 60(-9.25,-14.85) 61(-8.75,-14.85) 62(-8.25,-14.85) 63(-7.75,-14.85) 64(-7.25,-14.85) 65(-6.75,-14.85) 66(-6.25,-14.85) 67(-5.75,-14.85) 68(-5.25,-14.85) 69(-4.75,-14.85) 70(-4.25,-14.85) 71(-3.75,-14.85) 72(-3.25,-14.85) 73(-2.75,-14.85) 74(-2.25,-14.85) 75(-1.75,-14.85) 76(-1.25,-14.85) 77(-0.75,-14.85) 78(-0.25,-14.85) 79(0.25,-14.85) 80(0.75,-14.85) 81(1.25,-14.85) 82(1.75,-14.85) 83(2.25,-14.85) 84(2.75,-14.85) 85(3.25,-14.85) 86(3.75,-14.85) 87(4.25,-14.85) 88(4.75,-14.85) 89(5.25,-14.85) 90(5.75,-14.85) 91(6.25,-14.85) 92(6.75,-14.85) 93(7.25,-14.85) 94(7.75,-14.85) 95(8.25,-14.85) 96(8.75,-14.85) 97(9.25,-14.85) 98(9.75,-14.85) 99(10.25,-14.85) 100(10.75,-14.85) 101(11.25,-14.85) 102(11.75,-14.85) 103(12.25,-14.85) 104(12.75,-14.85) 157(12.75,14.85) 158(12.25,14.85) 159(11.75,14.85) 160(11.25,14.85) 161(10.75,14.85) 162(10.25,14.85) 163(9.75,14.85) 164(9.25,14.85) 165(8.75,14.85) 166(8.25,14.85) 167(7.75,14.85) 168(7.25,14.85) 169(6.75,14.85) 170(6.25,14.85) 171(5.75,14.85) 172(5.25,14.85) 173(4.75,14.85) 174(4.25,14.85) 175(3.75,14.85) 176(3.25,14.85) 177(2.75,14.85) 178(2.25,14.85) 179(1.75,14.85) 180(1.25,14.85) 181(0.75,14.85) 182(0.25,14.85) 183(-0.25,14.85) 184(-0.75,14.85) 185(-1.25,14.85) 186(-1.75,14.85) 187(-2.25,14.85) 188(-2.75,14.85) 189(-3.25,14.85) 190(-3.75,14.85) 191(-4.25,14.85) 192(-4.75,14.85) 193(-5.25,14.85) 194(-5.75,14.85) 195(-6.25,14.85) 196(-6.75,14.85) 197(-7.25,14.85) 198(-7.75,14.85) 199(-8.25,14.85) 200(-8.75,14.85) 201(-9.25,14.85) 202(-9.75,14.85) 203(-10.25,14.85) 204(-10.75,14.85) 205(-11.25,14.85) 206(-11.75,14.85) 207(-12.25,14.85) 208(-12.75,14.85)
  silkscreen extent -14.97,-13.55 13.55,13.57, body extent -14,-14 14,14, height 4.1
PVB4 [mm]
  rrect50% 1.9x2.8 smd: 1(5.7,2.3) 2(5.7,-2.3) C1(-5.7,2.3) C2(-5.7,-2.3)
  round 0 hole 1.6: ""(-3,3.35)
  round 0 hole 1.1: ""(3,3.35)
RAD-0.2 [mm] "Radial Cap, Thru-Hole; 2 Leads; 0.2 in Pin Spacing"
  round 1.2 hole 0.7: 1(-2.54,0) 2(2.54,0)
  silkscreen extent -4.44,-1.91 4.44,1.91
SCSI50 [mm]
  oval 1.6x2 hole 1: 1(0,0) 2(2.16,0) 3(4.32,0) 4(6.48,0) 5(8.64,0) 6(10.8,0) 7(12.96,0) 8(15.12,0) 9(17.28,0) 10(19.44,0) 11(21.6,0) 12(23.76,0) 13(25.92,0) 14(28.08,0) 15(30.24,0) 16(32.4,0) 17(34.56,0) 18(36.72,0) 19(38.887,0) 20(41.047,0) 21(43.207,0) 22(45.367,0) 23(47.527,0) 24(49.687,0) 25(51.847,0) 26(51.847,-4.293) 27(49.687,-4.293) 28(47.527,-4.293) 29(45.367,-4.293) 30(43.207,-4.293) 31(41.047,-4.293) 32(38.887,-4.293) 33(36.72,-4.293) 34(34.56,-4.293) 35(32.4,-4.293) 36(30.24,-4.293) 37(28.08,-4.293) 38(25.92,-4.293) 39(23.76,-4.293) 40(21.6,-4.293) 41(19.44,-4.293) 42(17.28,-4.293) 43(15.12,-4.293) 44(12.96,-4.293) 45(10.8,-4.293) 46(8.64,-4.293) 47(6.48,-4.293) 48(4.32,-4.293) 49(2.16,-4.293) 50(0,-4.293)
  round 10 hole 4.3: 51(-11.51,-2.145) 52(63.35,-2.145)
  silkscreen extent -15.52,-13.75 67.36,-13.75
SO8_N [mm] "SOIC, 8-Leads, Body 4.9x3.9mm, Pitch 1.27mm, IPC Medium Density"
  oval 2.2x0.6 smd: 1(-2.4,1.905) 2(-2.4,0.635) 3(-2.4,-0.635) 4(-2.4,-1.905) 5(2.4,-1.905) 6(2.4,-0.635) 7(2.4,0.635) 8(2.4,1.905)
  silkscreen extent -2.53,-2.5 0.9,2.88, body extent -2,-2.5 2,2.5, height 1.75
SO14 [mm] "SOIC, 14-Leads, Body 8.65x3.90mm, Pitch 1.27mm, IPC Medium Density"
  oval 2.2x0.6 smd: 1(-2.4,3.81) 2(-2.4,2.54) 3(-2.4,1.27) 4(-2.4,0) 5(-2.4,-1.27) 6(-2.4,-2.54) 7(-2.4,-3.81) 8(2.4,-3.81) 9(2.4,-2.54) 10(2.4,-1.27) 11(2.4,0) 12(2.4,1.27) 13(2.4,2.54) 14(2.4,3.81)
  silkscreen extent -2.52,-4.4 0.9,4.78, body extent -2,-4.4 2,4.4, height 1.75
SOG20_N [mm] "SOIC, 20-Leads, Body 12.8x7.5mm, Pitch 1.27mm, IPC Medium Density"
  oval 2x0.6 smd: 1(-4.7,5.715) 2(-4.7,4.445) 3(-4.7,3.175) 4(-4.7,1.905) 5(-4.7,0.635) 6(-4.7,-0.635) 7(-4.7,-1.905) 8(-4.7,-3.175) 9(-4.7,-4.445) 10(-4.7,-5.715) 11(4.7,-5.715) 12(4.7,-4.445) 13(4.7,-3.175) 14(4.7,-1.905) 15(4.7,-0.635) 16(4.7,0.635) 17(4.7,1.905) 18(4.7,3.175) 19(4.7,4.445) 20(4.7,5.715)
  silkscreen extent -4.82,-6.5 3.3,6.69, body extent -3.8,-6.5 3.8,6.5, height 2.65
SOT23-5 [mm]
  rect 0.6x1.05 smd mask+0.07: 1(-0.95,0) 2(0,0) 3(0.95,0) 4(0.955,2.7) 5(-0.95,2.7)
SOT-23B_L [mm] "SOT23, 3-Leads, Body 2.9x1.3mm, Pitch 0.95mm, Lead Span 2.4mm, IPC High Density"
  rect 0.85x0.6 smd: 1(-1.075,0.95) 2(-1.075,-0.95) 3(1.075,0)
  silkscreen extent -1.2,-1.5 0.7,1.92, body extent -0.7,-1.5 0.7,1.5, height 1.14
TOSHIBA_11_11F1 [mm]
  oval 2.1x0.6 smd: 1(-3.025,4.445) 2(-3.025,3.175) 3(-3.025,1.905) 4(-3.025,0.635) 5(-3.025,-0.635) 6(-3.025,-1.905) 7(-3.025,-3.175) 8(-3.025,-4.445) 9(3.025,-4.445) 10(3.025,-3.175) 11(3.025,-1.905) 12(3.025,-0.635) 13(3.025,0.635) 14(3.025,1.905) 15(3.025,3.175) 16(3.025,4.445)
  silkscreen extent -3.15,-5.3 1.58,5.42, body extent -2.4,-5.3 2.4,5.3, height 2.4

## Part data
C1 Cb12 Cb13 Cb18 Cb19 Cb20 Cb26 Cb28 Cb38 Cb39 Cb53 Cb65 Cb66 Cb76 Cb78 Cb91 Cb92 Cb105 Cb117 Cb118 Cb128 Cb130 Cb143 Cb144 Cb156 Cb170 Cb171 Cb184 Cb186 Cb196 Cb197 Cb208 CbA5 CbA8 CbA10 CbA16 CbA21 CbA27 CbA33 CbA39 CbA45 CbA53 CbA59 CbA61 CbA62 CbB5 CbB6 CbB19 CbB25 CbB31 CbB36 CbB41 CbB43 CbB54 CbB59 CbB61 CbB62 CbJ CbJ1 CbU4 CbU6 CbU7 CbU8 CbU9 CbU10 CbU11 CbU12 CbU13 CbU14 CbU15 CbU16 CbU17 CbU18 Cp1 Cp2 Cp3 Cp4: library part "Cap Semi", "Capacitor (Semiconductor SIM Model)"
D1 D2 D3 D4 D5 D6 D7 D8 D9: "Typical BLUE SiC LED"
J1: "Receptacle Header Assemby"
JTAG: "Header, 5-Pin, Dual row"
M0 M1 M2 O1E O2E: library part Jumper, "Jumper Wire"
P1: "Card, 116-Position"
Q1 Q2 Q3 Q4 Q5 Q6 Q7 Q8 Q9: "NPN Bipolar Transistor"
R1 R2 R3 R4 R5 R6 R7 R8 R9 R10 R11 R12 R13 R14 R15 R16 R17 R18 R19 R20 R21 R22 R23 R24 R25 R26 R27 R28 R29 R30 R31 R32 R33 R34 R35 R36 R37 R38 R39 R40 R41 R42 R43 R44 R45 R46 R47 R48 R49 R50 R51 R52 R53 R54 R55 R56 R57 R59 R60 R61 R62 R63 R64 R65 R66 R67 R68 R69 R70 R71 R72 R73 R74 R75 R76 R77 R78 R79 R80 R81 R82 R83 R84 R85 R86 R87 R88 R89 R90 R91 R92 R93 R94 R95 R96 R97 R98 R99 R100 R101 R102 R103 R104 R105 R106 R107: library part Res3, "Resistor"
S1 S2: "Tactile Switch, DPST; Thru-Hole; Vertical; Rating DC 12V, 50mA (max)"
U1: "Spartan-II 2.5V FPGA, 140 User I/Os, 208-Pin PQFP, Standard Performance, Commercial Grade, Pb-Free"
U2: "XC18V00 Series, In-System Programmable Configuration 3.3V PROM, 20-Pin SOIC, 1-Megabit, Commercial Grade, Pb-Free"
U15 U16 U17: "4-Pin Phototransistor Optocoupler"

## Free pads (board coordinates)
  round 1.27 hole 3.175: 4(7.676,5.009)

## Via types
v1: diameter 1.27, hole 0.711, Top Layer to Bottom Layer, 303 vias
v2: diameter 2.032, hole 1.016, Top Layer to Bottom Layer, 3 vias
v3: diameter 1.27, hole 0.711, Top Layer to Bottom Layer, tented top, 1 vias

## Nets (pads, with @x,y where several pads share a name; then routed paths per layer and width w, separated by ;. In a path a pad name is that pad's centre, name@x,y a point inside that pad or via, vN(x,y) a via of type N, cw(c..) or ccw(c..) an arc to the next point about the centre after c; other vN are vias at no path point)
2V5: Cb13.- Cb28.- Cb38.- Cb66.- Cb76.- Cb91.- Cb118.- Cb128.- Cb143.- Cb171.- Cb186.- Cb196.- CbJ.- CbU4.- Cp4.- JTAG.4 R9.1 R11.2 R12.2 U1.13 U1.28 U1.38 U1.66 U1.76 U1.91 U1.118 U1.128 U1.143 U1.171 U1.186 U1.196 U4.5 U5.OUT | length 178.7
  Top Layer w0.254: U1.196@71.51,31.604 72.752,31.604 73.787,32.639 77.4,32.639 78.162,31.877 v1(78.486,31.877) v1@78.486,31.559 ; U1.186@71.51,36.604 81.633,36.604 v1(81.661,36.576) ; U1.171@71.51,44.104 72.863,44.104 73.787,43.18 76.835,43.18 78.994,45.339 78.994,45.593 v1(79.121,45.593) ; v1(77.597,46.736) 77.851,46.736 80.632,49.517 80.632,51.321 80.11,51.843 U1.143@80.11,53.204 ; v1@78.613,29.972 78.232,29.972 77.978,29.718 78.232,29.718 78.423,29.909 80.264,28.067 80.264,27.073 80.886,26.451 80.886,25.619 80.299,25.032 80.045,25.032 79.61,24.597 U1.13@79.61,23.504 ; v1(84.963,28.956) 86.233,28.956 88.138,27.051 88.138,25.654 87.11,24.626 U1.28@87.11,23.504 ; U1.128@87.61,53.204 87.61,51.963 88.265,51.308 v1(88.265,45.847) ; v1(89.916,45.212) 90.678,45.974 90.678,51.054 91.313,51.689 92.075,51.689 92.61,52.224 U1.118@92.61,53.204 ; U1.38@92.11,23.504 92.11,25.111 91.059,26.162 91.059,28.829 92.456,30.226 v1(92.456,30.48) ; v1(94.234,42.418) 98.425,42.418 99.822,43.815 99.822,44.323 100.103,44.604 U1.91@101.21,44.604 ; v1(94.869,30.099) 94.996,30.099 94.996,31.391 97.755,34.15 98.692,34.15 99.849,32.993 99.849,32.358 100.103,32.104 U1.66@101.21,32.104 ; v1@95.504,36.195 96.012,36.195 v1@96.139,36.322 ; v1(95.631,36.449) 96.286,37.104 U1.76@101.21,37.104
  Top Layer w0.762: CbJ.-@56.341,64.643 56.341,61.896 JTAG.4@56.388,61.849 ; v1@136.652,13.97 v1(136.652,14.478) ; R9.1@141.752,18.315 R9.1@141.906,18.161
  Mid-Layer 1 w0.762: 107.87,46.562 109.06,47.752 110.998,47.752 112.395,46.355 114.427,46.355 115.824,47.752 v1(119.634,47.752)
  Bottom Layer w0.254: v1(77.597,46.736) 80.899,46.736 81.327,46.308 Cb143.-@81.327,45.085 ; v1@77.978,29.718 v1@78.232,29.972 ; v1(78.486,31.877) 78.486,33.481 Cb196.-@78.533,33.528 ; v1@78.613,29.972 v1@78.232,29.972 ; Cb186.-@78.994,36.623 79.041,36.576 v1(81.661,36.576) ; Cb171.-@78.994,43.895 78.994,45.466 v1(79.121,45.593) ; Cb13.-@80.565,30.734 79.248,30.734 78.55,30.035 78.296,30.035 v1@78.232,29.972 ; v1(84.963,28.956) 84.963,29.972 85.518,30.527 Cb28.-@86.741,30.527 ; Cb128.-@86.614,44.149 88.265,45.8 v1(88.265,45.847) ; Cb38.-@89.916,30.527 92.409,30.527 v1(92.456,30.48) v1@92.456,30.226 ; v1(89.916,45.212) 91.868,45.212 Cb118.-@91.995,45.085 ; Cb91.-@91.774,42.418 v1(94.234,42.418) ; Cb66.-@92.837,32.559 92.837,32.131 v1(94.869,30.099) ; Cb76.-@94.107,37.512 94.949,37.512 96.139,36.322 96.012,36.195 v1@95.504,36.195 ; v1@95.25,30.353 v1@95.25,30.48 ; R12.2@109.716,48.399 R12.2@109.716,48.641
  Bottom Layer w0.762: R12.2@109.716,48.641 109.982,48.641 112.243,46.38 114.96,46.38 116.332,47.752 v1(119.634,47.752) 121.285,49.403 121.285,50.546 120.027,51.804 R11.2@117.475,51.804 116.113,53.166 CbU4.-@114.935,53.166 114.888,53.119 U4.5@112.583,53.119 U4.5@112.649,53.053
  other v1: 136.652,10.922 138.43,10.922 136.652,12.7 138.43,14.478 78.232,30.099
  other v3: 138.43,12.7
3V3: Cb12.- Cb18.- Cb19.- Cb20.- Cb26.- Cb39.- Cb53.- Cb65.- Cb78.- Cb92.- Cb105.- Cb117.- Cb130.- Cb144.- Cb156.- Cb170.- Cb184.- Cb197.- Cb208.- CbU6.- CbU15.- CbU16.- CbU17.- CbU18.- Cp2.- R1.2 R2.2 R3.2 R4.2 R7.1 R13.2 R14.2 R15.2 R16.2 R17.2 R18.2 R19.2 R20.2 U1.12 U1.26 U1.39 U1.53 U1.65 U1.78 U1.92 U1.105 U1.117 U1.130 U1.144 U1.156 U1.170 U1.184 U1.197 U1.208 U2.18 U2.19 U2.20 U3.OUT U6.4 U15.10 U15.12 U15.14 U15.16 U16.10 U16.12 U16.14 U16.16 U17.10 U17.12 U17.14 U17.16 U18.4 | length 209.1
  Top Layer w0.254: U1.208@71.51,25.604 73.102,25.604 73.914,26.416 v1(73.914,27.305) ; U1.197@71.51,31.104 73.903,31.104 v1(73.914,31.115) ; U1.184@71.51,37.604 73.291,37.604 73.914,38.227 74.041,38.1 v1(74.041,37.973) ; U1.170@71.51,44.604 v1(73.887,44.604) ; U1.156@73.61,53.204 73.61,52.247 74.168,51.689 74.93,51.689 v1(75.819,50.8) ; U1.12@79.11,23.504 79.115,23.509 79.115,25.267 79.397,25.549 ; U1.144@79.61,53.204 79.61,50.565 v1(79.629,50.546) ; v1@79.629,26.035 v1(79.883,26.035) ; U1.26@86.11,23.504 86.11,25.273 86.106,25.273 v1(86.868,26.035) ; U1.130@86.61,53.204 86.61,51.693 v1@87.249,51.054 ; v1@91.821,50.927 92.075,50.927 93.11,51.962 U1.117@93.11,53.204 ; U1.39@92.61,23.504 92.61,25.046 92.964,25.4 v1(92.964,26.035) ; v1(98.044,50.673) 99.11,51.739 U1.105@99.11,53.204 ; v1(98.171,33.147) 99.714,31.604 U1.65@101.21,31.604 ; v1(98.679,44.45) 98.679,44.704 99.079,45.104 U1.92@101.21,45.104 ; v1(98.726,38.147) 98.769,38.104 U1.78@101.21,38.104 ; U1.53@101.21,25.604 101.21,25.155 v1(102.362,24.003) ; CbU18.-@123.698,23.669 CbU18.-@123.698,23.74 ; v1(129.54,54.483) v1@129.667,54.483
  Top Layer w0.762: U15.10@31.981,16.256 30.861,16.256 29.972,17.145 29.972,18.796 ; U15.12@31.981,18.796 29.972,18.796 ; U15.14@31.981,21.336 29.972,21.336 ; U15.16@31.981,23.876 29.972,23.876 ; v1(33.02,26.162) 32.258,26.924 CbU15.-@30.306,26.924 29.972,26.59 29.972,23.876 ; 44.45,27.131 44.45,24.892 44.958,24.384 U16.10@46.332,24.384 ; U16.12@46.332,26.924 44.784,26.924 44.45,27.258 44.45,29.464 ; U16.14@46.332,29.464 44.45,29.464 ; U16.16@46.332,32.004 44.45,32.004 ; v1(48.514,35.56) 47.879,34.925 CbU16.-@44.657,34.925 44.45,34.718 44.45,32.004 ; v1(53.975,33.274) 55.88,35.179 55.88,40.005 56.976,41.101 56.976,41.275 ; CbU17.-@56.976,51.689 56.976,48.895 ; U17.10@58.905,41.275 56.976,41.275 ; U17.12@58.905,43.815 56.976,43.815 ; U17.14@58.905,46.355 56.976,46.355 ; U17.16@58.905,48.895 56.976,48.895 ; U6.4@115.189,36.313 120.198,36.313 CbU6.-@120.396,36.115 123.143,36.115 v1(123.19,36.068) ; U18.4@119.253,23.74 123.698,23.74 124.07,23.74 125.476,25.146 125.476,31.242 v1(123.19,33.528) ; R14.2@119.888,69.989 121.424,69.989 v1(122.555,71.12) ; v1(120.015,64.897) R13.2@120.015,66.306 ; R15.2@120.015,73.799 122.543,73.799 v1(122.555,73.787) ; R16.2@120.015,77.609 122.543,77.609 v1(122.555,77.597) ; R17.2@120.015,81.292 122.67,81.292 v1(122.682,81.28) ; R18.2@120.142,85.102 122.543,85.102 v1(122.555,85.09) ; R19.2@120.142,89.039 121.678,89.039 122.682,90.043 v1(122.682,90.424) ; R20.2@120.142,93.23 122.543,93.23 v1(122.555,93.218) ; v1@129.667,54.483 131.306,56.122 R4.2@131.306,57.531 ; 29.972,18.796 29.972,21.336 ; 29.972,21.336 29.972,23.876 ; 44.45,29.464 44.45,32.004 ; 56.976,41.275 56.976,43.815 ; 56.976,43.815 56.976,46.355 ; 56.976,46.355 56.976,48.895
  Bottom Layer w0.254: v1(73.887,44.604) 73.961,44.53 Cb170.-@75.946,44.53 ; v1(73.914,27.305) 75.104,27.305 Cb208.-@75.946,26.463 ; v1(73.914,31.115) 75.899,31.115 Cb197.-@75.946,31.162 ; v1(74.041,37.973) 74.041,38.1 73.914,38.227 73.994,38.307 Cb184.-@75.946,38.307 ; Cb156.-@74.469,48.768 75.819,50.118 v1(75.819,50.8) ; Cb12.-@79.041,27.94 79.108,27.873 79.108,26.81 v1(79.883,26.035) ; Cb144.-@79.549,48.006 79.629,48.086 v1(79.629,50.546) ; Cb130.-@86.694,48.006 87.249,48.561 v1(87.249,50.673) v1@87.249,50.8 ; v1(86.868,26.035) Cb26.-@86.868,28.067 ; v1@91.821,51.181 91.821,50.927 93.171,49.577 Cb117.-@93.171,48.006 ; Cb39.-@92.503,27.94 92.503,26.496 v1(92.964,26.035) ; Cb78.-@96.901,38.147 v1(98.726,38.147) v1@99.06,38.481 ; Cb92.-@97.155,43.862 98.345,43.862 98.806,44.323 v1@98.806,44.831 ; v1@97.917,32.639 98.171,32.893 v1(98.171,33.147) ; v1(98.044,50.673) 98.124,50.593 Cb105.-@98.124,48.768
  Bottom Layer w0.762: Cb20.-@53.674,53.975 Cb19.-@53.674,51.689 Cb18.-@53.674,49.403 54.229,49.403 ; v1(102.362,24.003) 102.362,25.273 ; 125.857,54.483 v1(129.54,54.483)
  other v1: 133.731,37.465 135.509,37.465 137.287,37.465 133.731,39.37 135.509,39.37 137.287,39.37 91.948,50.673
5V: CbA5.- CbA8.- CbA61.- CbA62.- CbB5.- CbB6.- CbB61.- CbB62.- CbJ1.- CbU7.- CbU8.- CbU9.- CbU10.- CbU11.- CbU12.- CbU13.- CbU14.- Cp1.- Cp3.- J1.13 J2.4 P1.A5 P1.A8 P1.A61 P1.A62 P1.B5 P1.B6 P1.B61 P1.B62 R34.1 R35.1 R36.1 R37.1 R38.1 R39.1 R40.1 R41.1 R42.1 R43.1 R44.1 R45.1 R63.2 R64.2 R65.2 R66.2 R67.2 R68.2 R69.2 R70.2 R71.2 R72.2 R73.2 R74.2 R107.1 U3.IN U3.SHDN U5.IN U5.SHDN U7.1 U8.1 U9.1 U10.1 U11.1 U12.1 U13.14 U14.14 | length 177.3
  Top Layer w0.254: CbB62.-@119.126,11.604 CbB62.-@119.253,11.477
  Top Layer w0.762: v1(30.861,40.005) CbU7.-@33.067,40.005 33.515,40.453 U7.1@33.515,42.545 ; v1(31.115,55.626) 31.242,55.753 CbU9.-@32.813,55.753 33.502,56.442 U9.1@33.502,58.039 ; v1(31.369,71.501) CbU11.-@33.321,71.501 33.816,71.996 U11.1@33.816,73.787 ; v1(42.418,47.117) 43.434,48.133 CbU8.-@44.497,48.133 ; v1(42.545,78.105) 43.295,78.855 CbU12.-@44.878,78.855 44.878,80.565 45.326,81.013 U12.1@45.326,81.649 U12.1@45.605,81.649 ; v1(42.672,63.246) CbU10.-@45.005,63.246 45.5,63.741 U10.1@45.5,65.913 ; CbU8.-@44.564,48.2 U8.1@44.564,50.292 ; P1.B5@46.869,4.628 46.869,8.63 v2(46.482,9.017) 46.482,10.588 46.228,10.842 48.387,10.842 48.387,9.006 48.139,8.757 P1.B6@48.139,4.628 ; R36.1@68.199,68.477 70.715,68.477 v1(70.739,68.453) ; R35.1@68.199,71.513 70.6,71.513 v1(70.739,71.374) ; R34.1@68.199,74.573 70.588,74.573 70.866,74.851 v1(70.866,74.93) ; R42.1@68.199,82.296 v1(70.612,82.296) ; R41.1@68.199,85.471 v1(70.485,85.471) ; R40.1@68.199,88.646 v1(70.612,88.646) ; v1(81.026,62.738) 81.026,62.484 81.788,61.722 82.943,61.722 R65.2@83.07,61.849 R64.2@83.07,64.389 ; v1(81.153,67.056) 81.661,67.056 81.788,67.183 82.042,66.929 R63.2@83.07,66.929 ; v1(81.407,88.9) R69.2@83.07,88.9 R70.2@83.07,86.36 ; v1(81.598,83.629) 81.788,83.82 R71.2@83.07,83.82 ; U14.14@92.57,88.9 92.71,89.04 CbU14.-@92.71,90.979 94.429,90.979 R74.2@95.25,90.158 97.524,90.158 v1(97.536,90.17) ; CbU13.-@92.583,68.881 92.697,68.767 93.375,68.767 93.955,68.187 ; U13.14@92.697,66.929 93.955,68.187 ; R66.2@95.25,61.837 96.024,61.837 96.647,61.214 v1(97.282,61.214) ; R67.2@95.25,65.012 95.262,65.024 96.139,65.024 97.282,63.881 v1(97.409,63.881) ; R72.2@95.25,84.062 95.262,84.074 v1(97.536,84.074) ; R73.2@95.25,87.11 v1(97.524,87.11) ; v1@98.298,68.187 R68.2@95.25,68.187 93.955,68.187 ; v2@117.983,10.334 v2(117.983,9.652) ; P1.B61@117.989,4.628 117.983,4.634 v2(117.983,9.652) ; CbB62.-@119.253,11.477 CbB62.-@119.253,11.604 R107.1@124.46,11.604 ; P1.B62@119.259,4.628 119.259,8.376 v2(117.983,9.652) ; U5.SHDN@136.619,20.32 137.414,21.115 U5.IN@138.352,21.115 137.207,19.97 Cp3.-@137.207,18.161 ; Cp1.-@136.699,45.847 136.699,48.721 U3.SHDN@136.779,48.801 U3.IN@138.479,48.801
  Mid-Layer 1 w0.762: v1(81.026,62.738) 81.026,62.484 81.407,62.865 81.788,62.865 ; v1(81.407,88.9) 81.407,83.439 v1(81.598,83.629) ; v1(97.524,87.11) v1@97.536,87.122
  Bottom Layer w0.254: v2(50.292,8.89) v2@50.927,9.525
  Bottom Layer w0.762: J1.13@13.97,52.947 17.434,52.947 CbJ1.-@17.573,53.086 ; CbA5.-@46.228,10.842 46.228,9.271 v2(46.482,9.017) 46.869,8.63 P1.A5@46.869,4.628 ; P1.A8@50.679,4.628 v2@50.679,8.89 ; v1(70.485,85.471) 70.727,85.229 R44.1@73.152,85.229 ; v1(70.612,82.296) 70.727,82.181 R43.1@73.152,82.181 ; v1(70.612,88.646) 73.14,88.646 R45.1@73.152,88.634 ; v1(70.739,68.453) 73.061,68.453 R37.1@73.152,68.362 ; v1(70.739,71.374) 70.739,71.247 70.902,71.41 R38.1@73.152,71.41 ; v1(70.866,74.93) 70.902,74.966 R39.1@73.152,74.966 ; CbA61.-@116.84,11.604 116.967,11.477 116.967,10.668 v2(117.983,9.652) ; P1.A61@117.989,4.628 v2@117.989,9.646 ; CbA62.-@119.253,11.604 119.253,10.414 118.491,9.652 v2(117.983,9.652) ; P1.A62@119.259,4.628 119.259,8.376 v2@117.989,9.646 ; v2(117.983,9.652) v2@117.989,9.646
  other v1: 130.302,43.18 131.953,44.577 130.302,45.339 133.477,46.101 131.953,46.736 133.477,48.26 43.053,66.04 43.053,68.072 98.298,68.199